# EAGLE board test board (EAGLE 6.5.0)
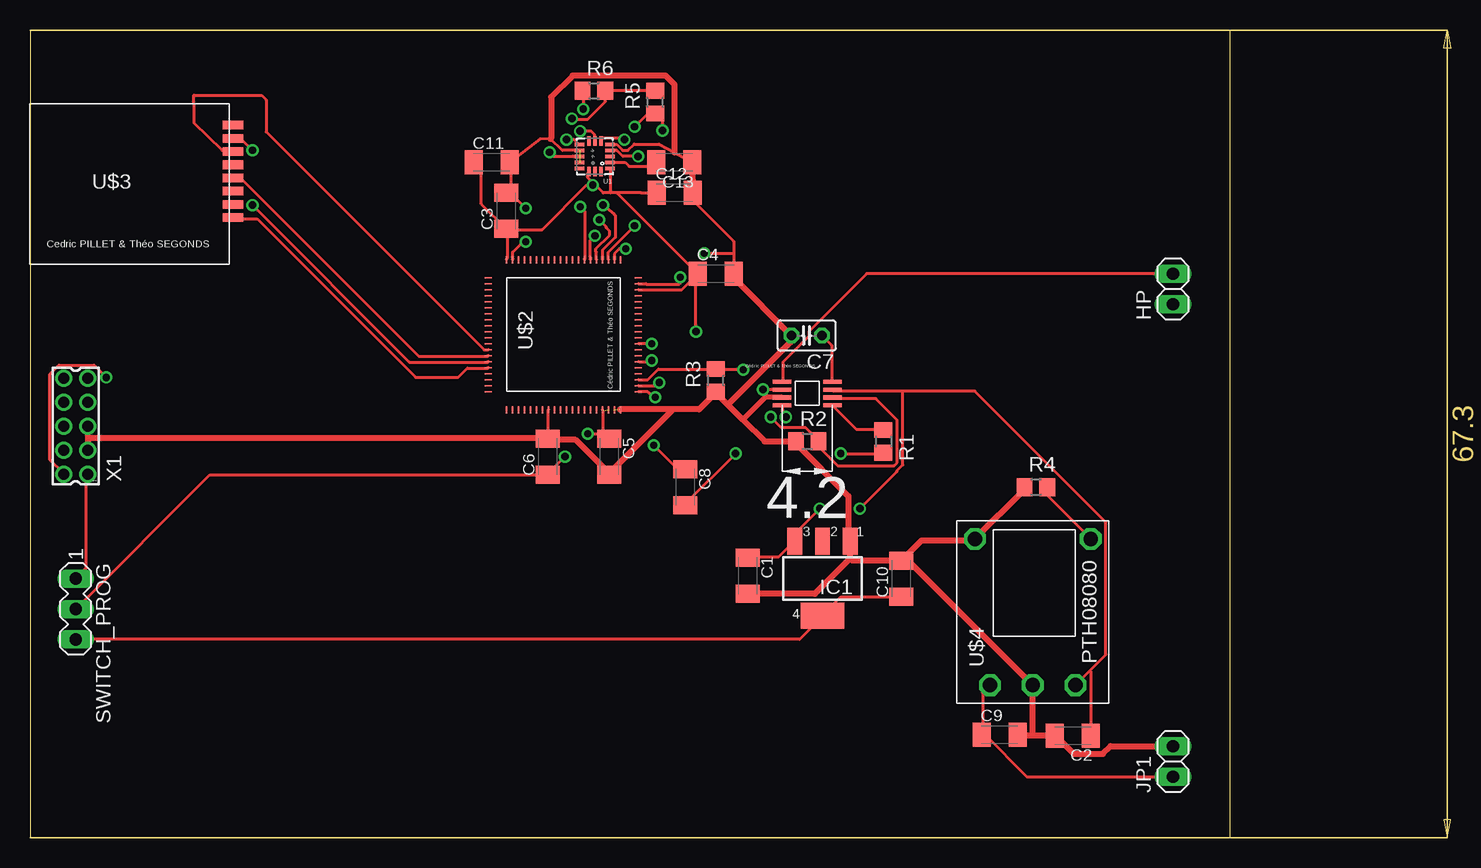
[diagram p0: board, top side]
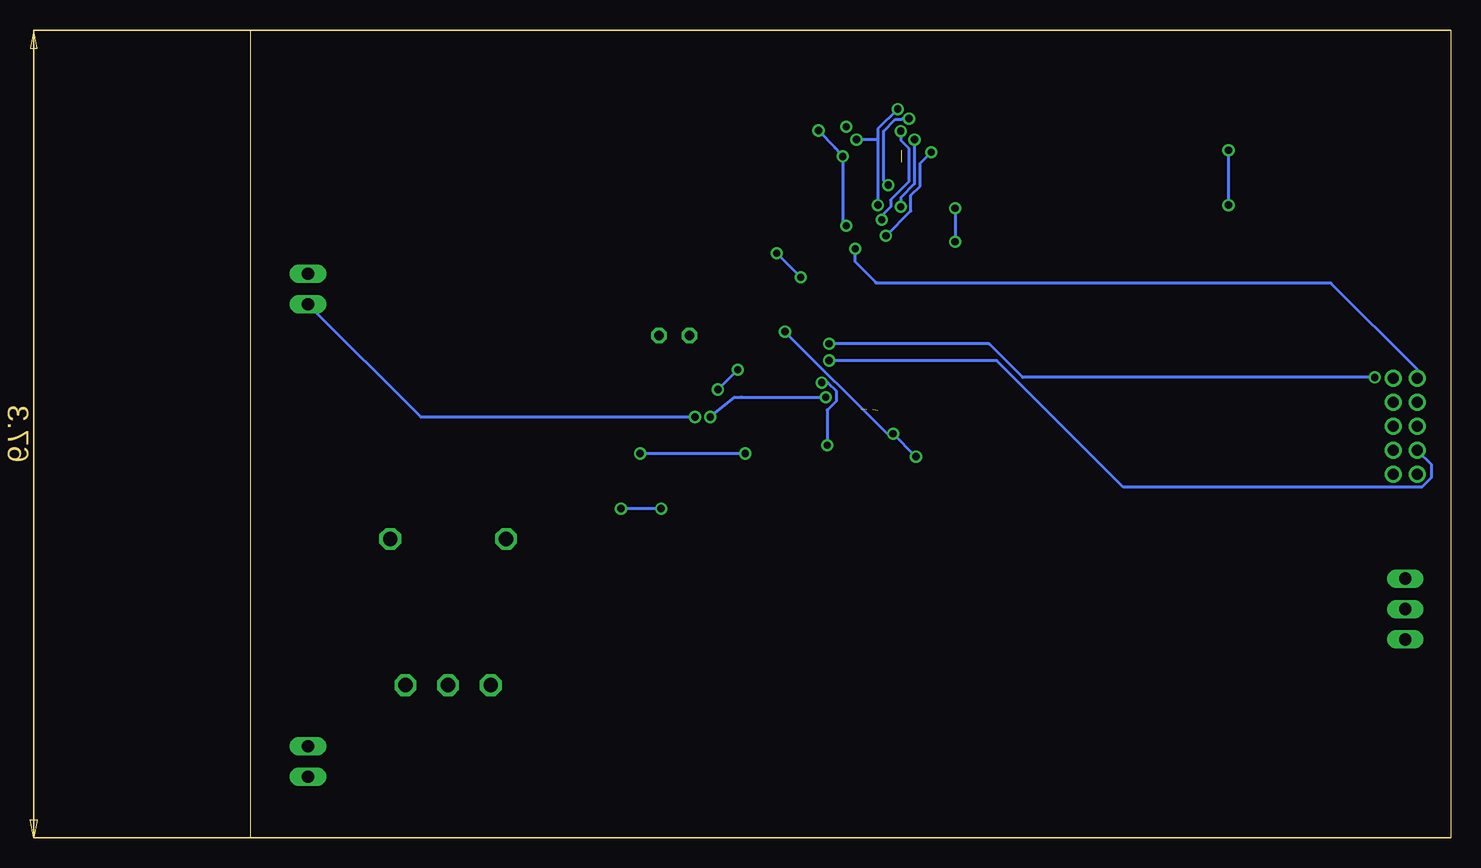
[diagram p1: board, bottom side, seen from below]

Size 100 x 67.3 mm. Coordinates in mm from the lower left corner, seen from the top.
Outline: 100,67.3 100,0 0,0 0,67.3
Copper layers (1*16): Top 0.035mm / dielectric 1.5mm / Bottom 0.035mm
Design rules "default": minimum track width 10mil, minimum drill 24mil, track to track 8mil, track to pad 8mil, pad to pad 8mil, via to via 8mil, smd to smd 8mil, copper to edge 40mil, drill to drill 8mil, minimum pad ring 10mil, minimum via ring 8mil, stop-mask expansion 4mil, vias tented up to drill 0mil, thermal gap 10mil
Net classes: 1 power: width 0.508 mm
tRestrict: area 38.5,36 to 50.4,47.8; area 63.4,35.4 to 66.1,38.5; area 15.5,49.1 to 19.4,50.8; area 15.4,59.9 to 19.4,61.4; area 0.6,45.7 to 3,64.7; area 46.2,55.9 to 48,57.7
bRestrict: area 56.5,45.8 to 57.8,48.2

## Footprints (pad centres in the part's own frame; a part is rotated, then mirrored left to right if it is on the bottom)
C1206K = smd 1.5 x 2: 1 -1.5,0; 2 1.5,0
C025-025X050 = drill 0.813 octagon: 1 -1.27,0; 2 1.27,0
1X02 = drill 1.016 long: 1 -1.27,0; 2 1.27,0
SOT223 = smd 1.219 x 2.235: 1 -2.311,-3.099; 2 0,-3.099; 3 2.311,-3.099 | smd 3.6 x 2.2: 4 0,3.099
R0805 = smd 1.3 x 1.5: 1 -0.95,0; 2 0.95,0
MA03-1 = drill 1.016 long: 1 -2.54,0; 2 0,0; 3 2.54,0
QFN-16_0.5MM = smd 0.8 x 0.3: 1 -1.275,1; 2 -1.275,0.5; 3 -1.275,0; 4 -1.275,-0.5; 5 -1.275,-1; 9 1.275,-1; 10 1.275,-0.5; 11 1.275,0; 12 1.275,0.5; 13 1.275,1 | smd 0.3 x 0.8: 6 -0.5,-1.275; 7 0,-1.275; 8 0.5,-1.275; 14 0.5,1.275; 15 0,1.275; 16 -0.5,1.275
TPA0211 = smd 1.55 x 0.35: BYPASS -2.1,-1.15; GND 2.1,0.15; IN -2.1,0.8; SE 2.1,-0.5; SHUTDOWN -2.1,0.15; VDD -2.1,-0.5; VO+ 2.1,-1.15; VO- 2.1,0.8
KL25Z_LQFP80 = smd 0.58 x 0.11: P$1 -6.25,4.75; P$2 -6.25,4.25; P$3 -6.25,3.75; P$4 -6.25,3.25; P$5 -6.25,2.75; P$6 -6.25,2.25; P$7 -6.25,1.75; P$8 -6.25,1.25; P$9 -6.25,0.75; P$10 -6.25,0.25; P$11 -6.25,-0.25; P$12 -6.25,-0.75; P$13 -6.25,-1.25; P$14 -6.25,-1.75; P$15 -6.25,-2.25; P$16 -6.25,-2.75; P$17 -6.25,-3.25; P$18 -6.25,-3.75; P$19 -6.25,-4.25; P$20 -6.25,-4.75; P$41 6.25,-4.75; P$42 6.25,-4.25; P$43 6.25,-3.75; P$44 6.25,-3.25; P$45 6.25,-2.75; P$46 6.25,-2.25; P$47 6.25,-1.75; P$48 6.25,-1.25; P$49 6.25,-0.75; P$50 6.25,-0.25; P$51 6.25,0.25; P$52 6.25,0.75; P$53 6.25,1.25; P$54 6.25,1.75; P$55 6.25,2.25; P$56 6.25,2.75; P$57 6.25,3.25; P$58 6.25,3.75; P$59 6.25,4.25; P$60 6.25,4.75 | smd 0.11 x 0.58: P$21 -4.75,-6.25; P$22 -4.25,-6.25; P$23 -3.75,-6.25; P$24 -3.25,-6.25; P$25 -2.75,-6.25; P$26 -2.25,-6.25; P$27 -1.75,-6.25; P$28 -1.25,-6.25; P$29 -0.75,-6.25; P$30 -0.25,-6.25; P$31 0.25,-6.25; P$32 0.75,-6.25; P$33 1.25,-6.25; P$34 1.75,-6.25; P$35 2.25,-6.25; P$36 2.75,-6.25; P$37 3.25,-6.25; P$38 3.75,-6.25; P$39 4.25,-6.25; P$40 4.75,-6.25; P$61 4.75,6.25; P$62 4.25,6.25; P$63 3.75,6.25; P$64 3.25,6.25; P$65 2.75,6.25; P$66 2.25,6.25; P$67 1.75,6.25; P$68 1.25,6.25; P$69 0.75,6.25; P$70 0.25,6.25; P$71 -0.25,6.25; P$72 -0.75,6.25; P$73 -1.25,6.25; P$74 -1.75,6.25; P$75 -2.25,6.25; P$76 -2.75,6.25; P$77 -3.25,6.25; P$78 -3.75,6.25; P$79 -4.25,6.25; P$80 -4.75,6.25
MICROSD = smd 1.722 x 0.711: P$1 -0.4,0.4; P$2 -0.4,-0.7; P$3 -0.4,-1.8; P$4 -0.4,-2.9; P$5 -0.4,-4; P$6 -0.4,-5.1; P$7 -0.4,-6.2; P$8 -0.4,-7.3
PTH08080EUF = drill 1.2 octagon: 1 0,0; 2 0,-3.556; 3 0,-7.112; 4 12.192,-8.382; 5 12.192,1.27
87758-1016 = drill 0.9 pad 1.27: 1 -4,-1; 2 -4,1; 3 -2,-1; 4 -2,1; 5 0,-1; 6 0,1; 7 2,-1; 8 2,1; 9 4,-1; 10 4,1

## Placement (x,y rotation side)
C1  [C1206K]  59.8,21.82 270 top
C2  [C1206K]  86.91,8.5 180 top
C3  [C1206K]  39.68,52.22 90 top
C4  [C1206K]  57.15,46.99 0 top
C5  [C1206K]  48.26,31.75 270 top
C6  [C1206K]  43.16,31.75 90 top
C7  [C025-025X050]  64.72,41.84 180 top
C8  0,47µ  [C1206K]  54.61,29.21 270 top
C9  [C1206K]  80.8,8.58 0 top
C10  [C1206K]  72.62,21.59 90 top
C11  4,7u  [C1206K]  38.47,56.28 0 top
C12  0,1u  [C1206K]  53.72,53.73 0 top
C13  0,1u  [C1206K]  53.7,56.27 180 top
HP  [1X02]  95.25,45.72 90 top
IC1  317EMP  [SOT223]  66.04,21.59 180 top
JP1  [1X02]  95.25,6.35 90 top
R1  10k  [R0805]  71.12,33.02 270 top
R2  [R0805]  64.77,33.02 0 top
R3  [R0805]  57.15,38.1 90 top
R4  350  [R0805]  83.82,29.21 0 top
R5  350  [R0805]  52.1,61.29 90 top
R6  350  [R0805]  46.99,62.23 0 top
SWITCH_PROG  [MA03-1]  3.81,19.05 270 top
U1  MMA8452Q  [QFN-16_0.5MM]  47.07,56.77 180 top
U$1  TPA0211  [TPA0211]  64.77,36.83 180 top
U$2  KL25Z_LQFP80  [KL25Z_LQFP80]  44.45,41.91 90 top
U$3  µSDCARDREADER  [MICROSD]  16.51,52.07 180 top
U$4  PTH08080  [PTH08080EUF]  80.01,12.7 90 top
X1  87758-1016  [87758-1016]  3.81,34.29 90 top

## Library data of the parts
C1-C13 R1-R6 = rcl
HP JP1 = pinhead
IC1 = linear
SWITCH_PROG = con-lstb; OC_FARNELL: unknown; OC_NEWARK: unknown
U1 = SparkFun-Sensors; PROD_ID: IC-10769
U$1 = TPA0211
U$2 = KL25Z_LQFP80
U$3 = Microsd
U$4 = PTH08080
X1 = con-molex; MF: MOLEX; MPN: 87758-1016; OC_FARNELL: 7472340; OC_NEWARK: 59J1558

## Nets
+3V3: C3.1 C4.1 C5.1 C6.1 C11.1 C12.1 R5.2 R6.2 SWITCH_PROG.2 U1.1 U1.14 U$2.P$17 U$2.P$18 U$2.P$38 U$2.P$60
+3V3_BAT: C10.1 IC1.4 SWITCH_PROG.3
+3V3_SWD: SWITCH_PROG.1 X1.1
+5V: C1.1 C2.1 IC1.3 U$1.VDD U$4.3
GND [power]: C1.2 C2.2 C3.2 C4.2 C5.2 C6.2 C7.2 C9.2 C10.2 C11.2 C12.2 C13.1 IC1.1 JP1.2 R2.1 R3.1 R4.1 U1.5 U1.10 U1.12 U$1.GND U$2.P$8 U$2.P$19 U$2.P$20 U$2.P$39 U$2.P$59 U$4.2 U$4.5 X1.3 X1.5
INT1: U1.11 U$2.P$46
INT2: U1.9 U$2.P$47
N$1: U$2.P$76 U$3.P$1
N$2: U$2.P$73 U$3.P$6
N$3: U$2.P$75 U$3.P$7
N$4: U$2.P$74 U$3.P$4
N$5: C8.2 R1.2
N$6: C7.1 U$1.BYPASS
N$7: HP.1 U$1.VO-
N$9: C13.2 U1.2
N$10: R1.1 U$1.IN
N$11: C8.1 U$2.P$22
N$12: R2.2 U$1.SHUTDOWN U$2.P$21
N$14: R3.2 U$1.SE U$2.P$23
N$18: R4.2 U$4.4
SA0: U1.7 U$2.P$45
SCL: R5.1 U1.4 U$2.P$43
SDA: R6.1 U1.6 U$2.P$44
SWD_CLK: U$2.P$26 X1.4
SWD_DIO: U$2.P$29 X1.2
SWD_RESET: U$2.P$42 X1.10
VDD: C9.1 JP1.1 U$4.1
VO+: HP.2 U$1.VO+

## Tracks (layer width: path | path; a pad name or v marks a point on that pad's centre or on a via)
+3V3  (via drill 0.6, 0.61)  (1 unrouted)
  Top 0.254: 46.99,54.49 47.75,53.72 48.39,53.72 | 46.99,54.49 46.8,54.67 | 46.8,54.67 46.48,54.99 46.48,55.37 U1.14 | 48.9,53.72 50.93,53.72 C12.1 | 48.9,53.72 48.39,53.72 | 48.39,53.72 48.39,55.75 U1.1 | 48.9,53.72 55.63,46.99 C4.1 | R5.2 52.07,62.23 R6.2 47.94,61.34 46.46,59.86 45.22,59.86 v45.16,59.92 | U$2.P$60 39.75,48.26 39.75,50.67 C3.1 | 46.8,54.67 46.48,54.36 46.35,54.36 42.67,50.67 39.88,50.67 C3.1 | U$2.P$17 47.75,35.56 47.75,33.78 48.26,33.27 C5.1 47.75,33.66 v46.48,33.66 | SWITCH_PROG.2 14.99,30.23 43.05,30.23 C6.1 43.18,30.35 v44.58,31.75 | v55.5,42.16 55.5,46.99 C4.1 | U$2.P$38 54.32,45.66 C4.1 | C3.1 37.62,52.78 37.62,55.62 C11.1 | v46.9,54.38 46.9,54.4 46.99,54.49
  Bottom 0.254: v44.58,31.75 v46.48,33.66 46.99,33.66 v55.5,42.16 | v45.16,59.92 45.7,59.92 45.76,59.86 46.3,59.86 47.28,58.88 47.28,54.76 v46.9,54.38
+3V3_BAT
  Top 0.254: C10.1 72.52,20.07 67.56,20.07 66.04,18.54 IC1.4 66.04,18.41 64.14,16.51 SWITCH_PROG.3
+3V3_SWD
  Top 0.254: SWITCH_PROG.1 4.7,22.48 4.7,30.23 X1.1
+5V  (via drill 0.6)
  Top 0.254: C1.1 59.82,23.37 62.36,23.37 63.63,24.64 IC1.3 63.72,24.82 63.72,25.32 v65.82,27.42 | 72.74,37.21 78.74,37.21 89.66,26.29 89.66,15.24 88.33,13.91 | 72.74,37.21 66.93,37.21 U$1.VDD | U$4.3 88.33,13.91 | C2.1 88.39,8.51 88.39,13.84 88.33,13.91 | v69.16,27.42 72.2,30.46 72.24,30.56 72.74,31.06 72.74,37.21
  Bottom 0.254: v65.82,27.42 v69.16,27.42
GND  (via drill 0.6)  (2 unrouted)
  Top 0.254: U1.5 48.89,57.77 49.39,57.28 49.83,57.28 50.34,57.79 52.43,57.79 53.69,57.09 C13.1 | U$2.P$8 43.2,33.5 C6.2 | U1.10 44.37,57.27 43.38,58.2 42.53,58.22 C11.2 40.11,56.14 40.11,53.72 C3.2 40.16,53.6 v41.32,52.44 | U$2.P$59 40.22,48.16 40.26,48.2 40.26,48.26 40.22,48.3 40.22,48.78 40.96,49.52 41.08,49.56 41.16,49.64 41.3,49.64 v41.32,49.66 | 58.64,48.7 58.64,49.68 55.22,53.1 55.22,53.48 C12.2 | 58.64,48.7 58.64,47.24 C4.2 | v56.18,48.7 58.64,48.7 | v54.18,46.7 54.18,46.18 54.12,46.12 51.36,46.12 51.32,46.16 U$2.P$39
  Top 0.406: U$1.GND 61.25,36.68 59.4,34.83
  Top 0.508: 83.57,8.51 82.42,8.51 C9.2 | 83.57,8.51 85.34,8.51 C2.2 85.6,8.38 87,6.99 89.41,6.99 90.04,7.62 JP1.2 | 83.57,8.51 U$4.2 73.03,23.24 C10.2 | R4.1 82.8,29.21 82.8,28.96 U$4.5 78.61,24.77 74.3,24.77 72.77,23.24 C10.2 | 68.33,23.24 65.41,20.32 59.82,20.32 C1.2 | 68.33,23.24 68.33,24.64 IC1.1 68.2,24.89 68.2,28.45 63.75,32.89 R2.1 61.21,33.02 59.4,34.83 58.17,36.07 | C10.2 72.52,23.11 68.45,23.11 68.33,23.24 | C12.2 55.22,54.18 55.2,55.59 C13.1 | C4.2 58.67,46.99 58.67,46.61 63.37,41.91 C7.2 63.37,41.66 63.37,41.27 58.17,36.07 | 4.83,33.27 4.83,34.29 X1.5 | 4.83,33.27 4.83,32.38 X1.3 | 53.47,35.69 55.75,35.69 57.15,37.08 R3.1 57.28,36.96 58.17,36.07 | 53.47,35.69 49.15,35.69 U$2.P$20 | 53.47,35.69 53.47,35.56 48.26,30.35 C5.2 48.13,30.48 45.47,33.15 43.18,33.15 C6.2 42.93,33.27 4.83,33.27 | 43.38,58.2 43.43,58.29 43.43,61.72 45.21,63.5 52.96,63.5 53.72,62.74 53.72,57.15 53.69,57.09
  Bottom 0.254: v41.32,52.44 v41.32,49.66 | v54.18,46.7 v56.18,48.7
INT1  (via drill 0.6)
  Top 0.254: v43.3,57.12 43.62,56.8 45.24,56.8 45.26,56.78 U1.11 | v47.08,50.16 46.7,49.78 46.7,48.36 46.72,48.34 46.72,48.26 46.7,48.24 U$2.P$46
  Bottom 0.254: v43.3,57.12 44.24,56.18 44.24,54.3 45,53.54 45,52.22 47.06,50.16 v47.08,50.16
INT2  (via drill 0.61)
  Top 0.254: v45.85,52.58 46.23,52.2 46.23,48.26 U$2.P$47 | v44.7,58.17 45.34,58.17 45.72,57.78 U1.9
  Bottom 0.254: v45.85,52.58 45.85,53.34 44.7,54.48 v44.7,58.17
N$1
  Top 0.254: U$2.P$76 38.1,39.12 36.45,39.12 35.69,38.35 32.13,38.35 18.92,51.56 17.02,51.56 U$3.P$1
N$2
  Top 0.254: U$2.P$73 38.1,40.64 37.85,40.64 19.68,58.8 19.68,61.47 19.3,61.85 13.66,61.87 13.67,60.56 13.67,59.55 16,57.28 16.89,57.28 U$3.P$6
N$3  (via drill 0.61)
  Top 0.254: v18.54,52.7 31.62,39.62 38.1,39.62 U$2.P$75 | v18.54,57.28 17.65,58.17 17.02,58.17 U$3.P$7
  Bottom 0.254: v18.54,57.28 v18.54,52.7
N$4
  Top 0.254: U$2.P$74 38.1,40.13 32.38,40.13 17.65,54.86 17.02,54.86 U$3.P$4
N$5  (via drill 0.61)
  Top 0.254: v67.56,32 71.12,32 R1.2 | v58.8,32 54.61,27.81 C8.2
  Bottom 0.254: v58.8,32 v67.56,32
N$6
  Top 0.254: U$1.BYPASS 66.8,38.1 66.8,41.02 66.04,41.78 C7.1
N$7  (via drill 0.61)
  Top 0.254: v62.99,35.05 62.74,35.31 62.74,35.94 U$1.VO-
  Bottom 0.254: v62.99,35.05 85.85,35.05 HP.1
N$9
  Top 0.254: U1.2 49.59,56.27 49.93,55.93 51.86,55.93 C13.2
N$10
  Top 0.254: R1.1 71.12,34.04 68.83,34.04 66.93,35.94 U$1.IN
N$11  (via drill 0.6)
  Top 0.254: U$2.P$22 52.44,37.66 v52.44,37.92 | v51.98,32.7 53.98,30.7 C8.1
  Bottom 0.254: v51.98,32.7 51.98,35.62 51.24,36.36 51.24,37.24 51.92,37.92 v52.44,37.92
N$12  (via drill 0.61)
  Top 0.254: v52.1,36.7 51.5,37.15 U$2.P$21 | v61.72,35.05 62.61,34.16 64.64,34.16 65.79,33.02 | 65.79,33.02 65.79,32.51 67.31,30.99 72.01,30.99 72.26,31.24 72.26,34.8 70.48,36.58 66.93,36.58 U$1.SHUTDOWN | 65.79,33.02 R2.2
  Bottom 0.254: v52.1,36.7 59.08,36.7 59.18,36.7 59.69,36.72 v61.72,35.05
N$14  (via drill 0.61)
  Top 0.254: v59.44,38.99 57.15,38.99 R3.2 52.37,39.04 51.48,38.16 U$2.P$23 | v61.09,37.34 62.61,37.34 U$1.SE
  Bottom 0.254: v61.09,37.34 v59.44,38.99
N$18
  Top 0.254: U$4.4 84.84,28.45 84.84,29.21 R4.2
SA0  (via drill 0.6)
  Top 0.254: v47.44,51.48 48.02,50.9 48.06,50.78 48.3,50.54 48.3,50.2 47.16,49.06 47.16,48.82 47.2,48.78 U$2.P$45 | v45.84,58.88 46.76,58.88 47.06,58.58 U1.7
  Bottom 0.254: v47.44,51.48 47.44,51.82 46.7,52.56 46.7,53.14 45.18,54.66 45.18,57.44 45.84,58.1 v45.84,58.88
SCL  (via drill 0.6, 0.61)
  Top 0.254: v50.67,56.77 49.4,56.77 48.9,57.28 48.39,57.28 U1.4 | v52.7,58.93 52.7,59.82 52.2,60.33 R5.1 51.98,60.34 51.48,60.34 v50.38,59.24 | v50.38,50.98 48.2,48.8 U$2.P$43
  Bottom 0.254: v52.7,58.93 51.32,57.47 v50.67,56.77 50.64,56.64 50.64,51.24 v50.38,50.98
SDA  (via drill 0.61)
  Top 0.254: v47.75,52.7 48.68,51.95 48.78,51.85 48.78,50.02 47.71,48.95 47.71,48.94 U$2.P$44 | v46.1,60.71 46.1,62.23 R6.1 | v49.53,58.17 49.4,58.29 47.75,58.29 47.62,58.17 U1.6
  Bottom 0.254: 47.75,58.17 47.75,59.05 v46.1,60.71 | 47.75,58.17 v47.75,52.7 | 47.75,58.17 v49.53,58.17
SWD_CLK  (via drill 0.61)
  Top 0.254: v51.82,39.75 51.69,39.62 50.8,39.62 U$2.P$26
  Bottom 0.254: v51.82,39.75 37.85,39.75 27.3,29.21 2.41,29.21 1.65,29.97 1.65,31.11 2.79,32.26 X1.4
SWD_DIO  (via drill 0.61)
  Top 0.254: v51.82,41.15 50.8,41.15 U$2.P$29 | v6.35,38.35 5.33,39.37 2.41,39.37 1.65,38.61 1.65,31.5 2.79,30.35 X1.2
  Bottom 0.254: v51.82,41.15 38.48,41.15 35.69,38.35 v6.35,38.35
SWD_RESET  (via drill 0.6)
  Top 0.254: U$2.P$42 48.7,48.64 49.12,49.06 v49.64,49.06
  Bottom 0.254: X1.10 2.81,39.01 10,46.2 47.92,46.2 47.96,46.32 49.64,48 v49.64,49.06
VDD
  Top 0.254: U$4.1 79.38,12.06 79.38,8.64 C9.1 79.5,8.64 83.06,5.08 JP1.1
VO+
  Top 0.254: HP.2 69.72,46.99 64.9,42.16 64.9,41.78 62.74,39.62 62.74,38.1 U$1.VO+